# EAGLE board Qwiic Pi SHIM_double_slot-Panel (EAGLE 9.5.1), part 1 of 2
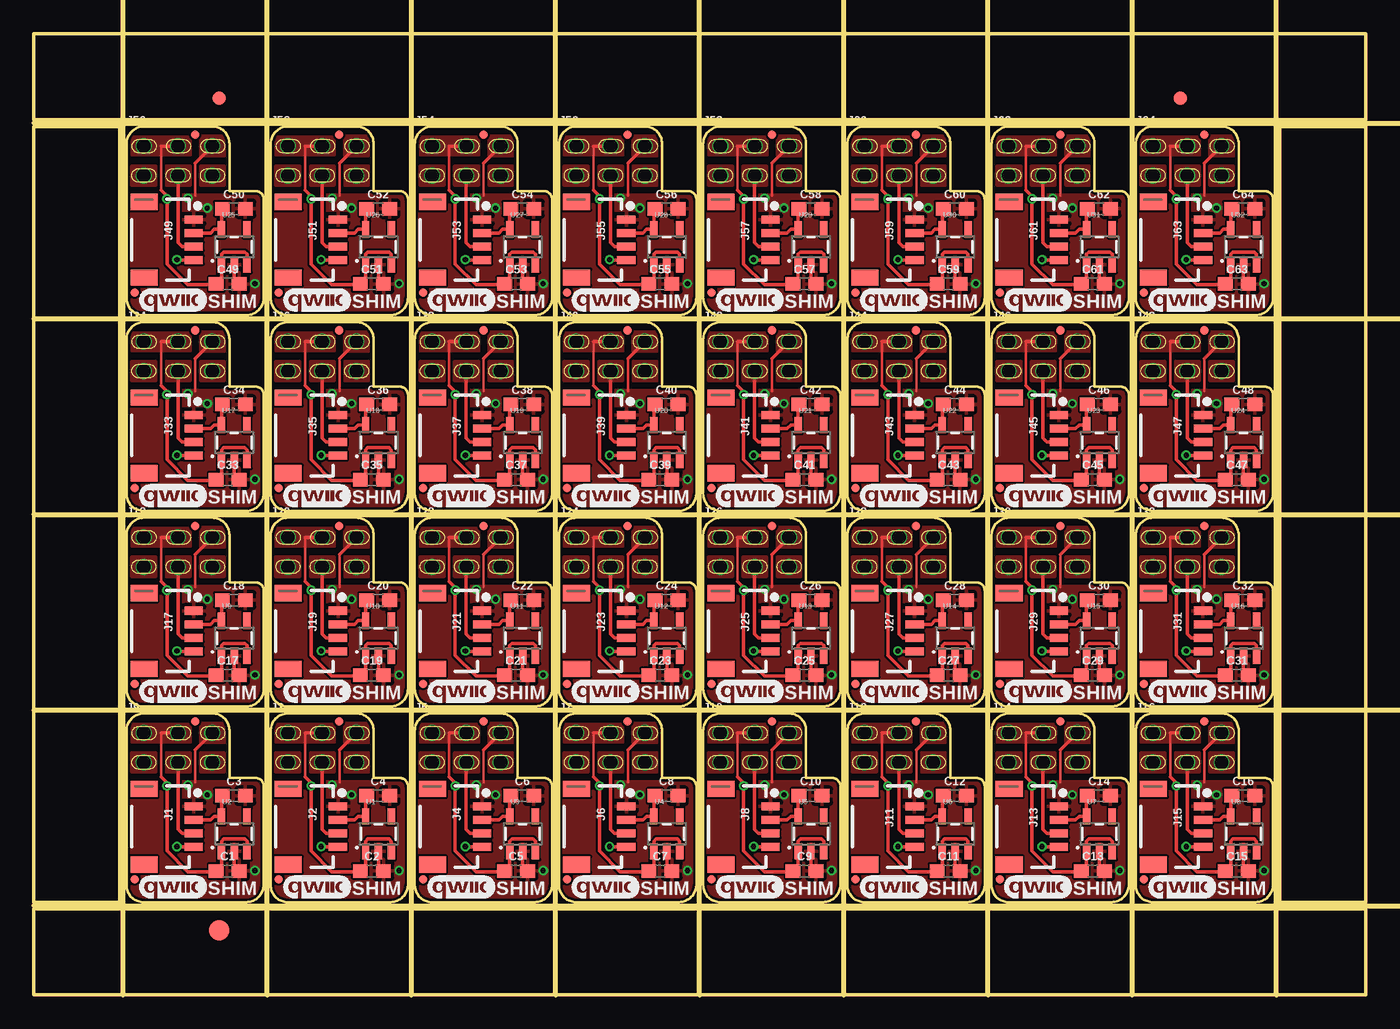
[diagram p0: board, top side]
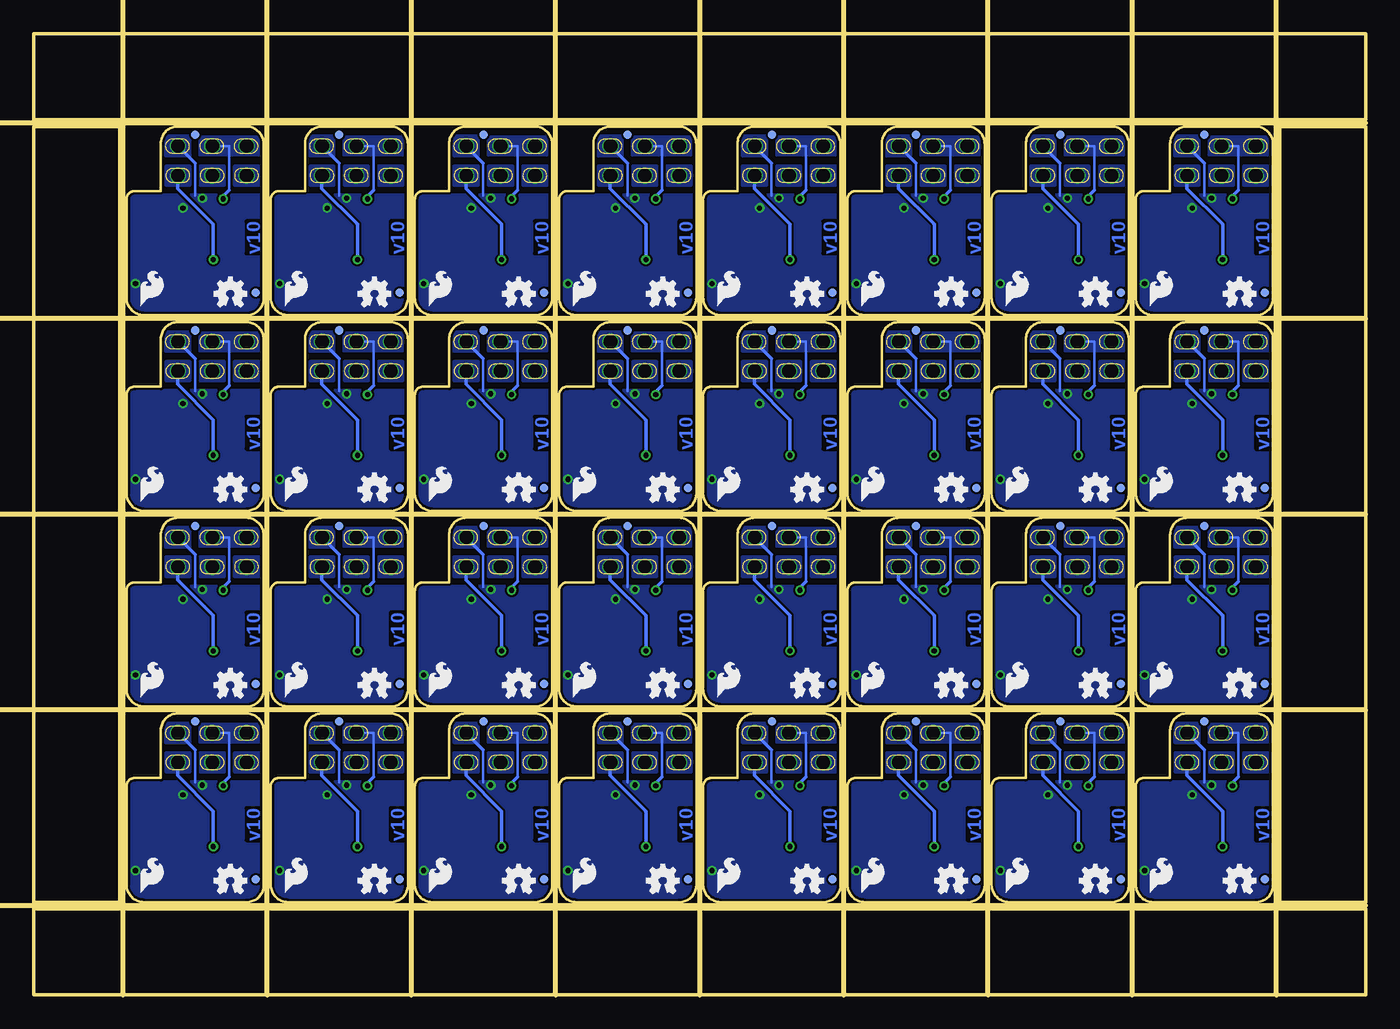
[diagram p1: board, bottom side, seen from below]

Size 98.55 x 71.12 mm. Coordinates in mm from the lower left corner, seen from the top.
Outline: 368 segments
Copper layers (1*16): Top 0.035mm / dielectric 1.5mm / Bottom 0.035mm
Design rules "SparkFun-2-layer-PCBWay-LIMIT *": minimum track width 6mil, minimum drill 0.3mm, track to track 6mil, track to pad 6mil, pad to pad 6mil, via to via 6mil, smd to smd 6mil, copper to edge 6mil, drill to drill 6mil, minimum pad ring 2mil, minimum via ring 6mil, stop-mask expansion 4mil, vias tented up to drill 25mil, thermal gap 10mil
Net classes: 0 Default: width 0.178 mm; 1 vcc: width 0.178 mm
Milling: 14 lines

## Footprints (pad centres in the part's own frame; a part is rotated, then mirrored left to right if it is on the bottom)
0603 = smd 1.1 x 1: 1 -0.85,0; 2 0.85,0
FIDUCIAL-1X2 = smd 1 x 1: 1 0,0
FIDUCIAL-1.5X3 = smd 1.5 x 1.5: 1 0,0
FIDUCIAL-MICRO = smd 0.635 x 0.635: 1 0,0
1X04_1MM_RA = smd 0.6 x 1.35: 1 -1.5,0; 2 -0.5,0; 3 0.5,0; 4 1.5,0 | smd 1.2 x 2: NC1 2.8,-3.675; NC2 -2.8,-3.675
SPARKFUN-CONNECTORS_2X3-NS_PISHIM_LOCKING_SLOTS_DOUBLE = drill 1.016 pad 1.168: 1 -2.54,-1.092; 2 -2.54,1.092; 3 0,-1.092; 4 0,1.092; 5 2.54,-1.092; 6 2.54,1.092
SOT23-5 = smd 0.55 x 1.2: 1 -0.95,-1.3; 2 0,-1.3; 3 0.95,-1.3; 4 0.95,1.3; 5 -0.95,1.3

## Placement (x,y rotation side)
C1  1.0uF  [0603]  14.35,9.17 0 top
C2  1.0uF  [0603]  25.02,9.17 0 top
C3  1.0uF  [0603]  14.81,14.73 0 top
C4  1.0uF  [0603]  25.48,14.73 0 top
C5  1.0uF  [0603]  35.69,9.17 0 top
C6  1.0uF  [0603]  36.14,14.73 0 top
C7  1.0uF  [0603]  46.35,9.17 0 top
C8  1.0uF  [0603]  46.81,14.73 0 top
C9  1.0uF  [0603]  57.02,9.17 0 top
C10  1.0uF  [0603]  57.48,14.73 0 top
C11  1.0uF  [0603]  67.69,9.17 0 top
C12  1.0uF  [0603]  68.15,14.73 0 top
C13  1.0uF  [0603]  78.36,9.17 0 top
C14  1.0uF  [0603]  78.82,14.73 0 top
C15  1.0uF  [0603]  89.03,9.17 0 top
C16  1.0uF  [0603]  89.48,14.73 0 top
C17  1.0uF  [0603]  14.35,23.65 0 top
C18  1.0uF  [0603]  14.81,29.21 0 top
C19  1.0uF  [0603]  25.02,23.65 0 top
C20  1.0uF  [0603]  25.48,29.21 0 top
C21  1.0uF  [0603]  35.69,23.65 0 top
C22  1.0uF  [0603]  36.14,29.21 0 top
C23  1.0uF  [0603]  46.35,23.65 0 top
C24  1.0uF  [0603]  46.81,29.21 0 top
C25  1.0uF  [0603]  57.02,23.65 0 top
C26  1.0uF  [0603]  57.48,29.21 0 top
C27  1.0uF  [0603]  67.69,23.65 0 top
C28  1.0uF  [0603]  68.15,29.21 0 top
C29  1.0uF  [0603]  78.36,23.65 0 top
C30  1.0uF  [0603]  78.82,29.21 0 top
C31  1.0uF  [0603]  89.03,23.65 0 top
C32  1.0uF  [0603]  89.48,29.21 0 top
C33  1.0uF  [0603]  14.35,38.13 0 top
C34  1.0uF  [0603]  14.81,43.69 0 top
C35  1.0uF  [0603]  25.02,38.13 0 top
C36  1.0uF  [0603]  25.48,43.69 0 top
C37  1.0uF  [0603]  35.69,38.13 0 top
C38  1.0uF  [0603]  36.14,43.69 0 top
C39  1.0uF  [0603]  46.35,38.13 0 top
C40  1.0uF  [0603]  46.81,43.69 0 top
C41  1.0uF  [0603]  57.02,38.13 0 top
C42  1.0uF  [0603]  57.48,43.69 0 top
C43  1.0uF  [0603]  67.69,38.13 0 top
C44  1.0uF  [0603]  68.15,43.69 0 top
C45  1.0uF  [0603]  78.36,38.13 0 top
C46  1.0uF  [0603]  78.82,43.69 0 top
C47  1.0uF  [0603]  89.03,38.13 0 top
C48  1.0uF  [0603]  89.48,43.69 0 top
C49  1.0uF  [0603]  14.35,52.6 0 top
C50  1.0uF  [0603]  14.81,58.17 0 top
C51  1.0uF  [0603]  25.02,52.6 0 top
C52  1.0uF  [0603]  25.48,58.17 0 top
C53  1.0uF  [0603]  35.69,52.6 0 top
C54  1.0uF  [0603]  36.14,58.17 0 top
C55  1.0uF  [0603]  46.35,52.6 0 top
C56  1.0uF  [0603]  46.81,58.17 0 top
C57  1.0uF  [0603]  57.02,52.6 0 top
C58  1.0uF  [0603]  57.48,58.17 0 top
C59  1.0uF  [0603]  67.69,52.6 0 top
C60  1.0uF  [0603]  68.15,58.17 0 top
C61  1.0uF  [0603]  78.36,52.6 0 top
C62  1.0uF  [0603]  78.82,58.17 0 top
C63  1.0uF  [0603]  89.03,52.6 0 top
C64  1.0uF  [0603]  89.48,58.17 0 top
E$1  [FIDUCIAL-1X2]  13.72,66.36 0 top
E$2  [FIDUCIAL-1X2]  84.84,66.36 0 top
E$3  [FIDUCIAL-1.5X3]  13.72,4.76 0 top
FD1  FIDUCIALUFIDUCIAL  [FIDUCIAL-MICRO]  11.94,20.22 180 top
FD2  FIDUCIALUFIDUCIAL  [FIDUCIAL-MICRO]  7.47,8.55 180 top
FD3  FIDUCIALUFIDUCIAL  [FIDUCIAL-MICRO]  7.47,8.55 0 bottom
FD4  FIDUCIALUFIDUCIAL  [FIDUCIAL-MICRO]  11.94,20.22 0 bottom
FD5  FIDUCIALUFIDUCIAL  [FIDUCIAL-MICRO]  22.61,20.22 180 top
FD6  FIDUCIALUFIDUCIAL  [FIDUCIAL-MICRO]  18.14,8.55 180 top
FD7  FIDUCIALUFIDUCIAL  [FIDUCIAL-MICRO]  18.14,8.55 0 bottom
FD8  FIDUCIALUFIDUCIAL  [FIDUCIAL-MICRO]  22.61,20.22 0 bottom
FD9  FIDUCIALUFIDUCIAL  [FIDUCIAL-MICRO]  33.27,20.22 180 top
FD10  FIDUCIALUFIDUCIAL  [FIDUCIAL-MICRO]  28.8,8.55 180 top
FD11  FIDUCIALUFIDUCIAL  [FIDUCIAL-MICRO]  28.8,8.55 0 bottom
FD12  FIDUCIALUFIDUCIAL  [FIDUCIAL-MICRO]  33.27,20.22 0 bottom
FD13  FIDUCIALUFIDUCIAL  [FIDUCIAL-MICRO]  43.94,20.22 180 top
FD14  FIDUCIALUFIDUCIAL  [FIDUCIAL-MICRO]  39.47,8.55 180 top
FD15  FIDUCIALUFIDUCIAL  [FIDUCIAL-MICRO]  39.47,8.55 0 bottom
FD16  FIDUCIALUFIDUCIAL  [FIDUCIAL-MICRO]  43.94,20.22 0 bottom
FD17  FIDUCIALUFIDUCIAL  [FIDUCIAL-MICRO]  54.61,20.22 180 top
FD18  FIDUCIALUFIDUCIAL  [FIDUCIAL-MICRO]  50.14,8.55 180 top
FD19  FIDUCIALUFIDUCIAL  [FIDUCIAL-MICRO]  50.14,8.55 0 bottom
FD20  FIDUCIALUFIDUCIAL  [FIDUCIAL-MICRO]  54.61,20.22 0 bottom
FD21  FIDUCIALUFIDUCIAL  [FIDUCIAL-MICRO]  65.28,20.22 180 top
FD22  FIDUCIALUFIDUCIAL  [FIDUCIAL-MICRO]  60.81,8.55 180 top
FD23  FIDUCIALUFIDUCIAL  [FIDUCIAL-MICRO]  60.81,8.55 0 bottom
FD24  FIDUCIALUFIDUCIAL  [FIDUCIAL-MICRO]  65.28,20.22 0 bottom
FD25  FIDUCIALUFIDUCIAL  [FIDUCIAL-MICRO]  75.95,20.22 180 top
FD26  FIDUCIALUFIDUCIAL  [FIDUCIAL-MICRO]  71.48,8.55 180 top
FD27  FIDUCIALUFIDUCIAL  [FIDUCIAL-MICRO]  71.48,8.55 0 bottom
FD28  FIDUCIALUFIDUCIAL  [FIDUCIAL-MICRO]  75.95,20.22 0 bottom
FD29  FIDUCIALUFIDUCIAL  [FIDUCIAL-MICRO]  86.61,20.22 180 top
FD30  FIDUCIALUFIDUCIAL  [FIDUCIAL-MICRO]  82.14,8.55 180 top
FD31  FIDUCIALUFIDUCIAL  [FIDUCIAL-MICRO]  82.14,8.55 0 bottom
FD32  FIDUCIALUFIDUCIAL  [FIDUCIAL-MICRO]  86.61,20.22 0 bottom
FD33  FIDUCIALUFIDUCIAL  [FIDUCIAL-MICRO]  11.94,34.7 180 top
FD34  FIDUCIALUFIDUCIAL  [FIDUCIAL-MICRO]  7.47,23.03 180 top
FD35  FIDUCIALUFIDUCIAL  [FIDUCIAL-MICRO]  7.47,23.03 0 bottom
FD36  FIDUCIALUFIDUCIAL  [FIDUCIAL-MICRO]  11.94,34.7 0 bottom
FD37  FIDUCIALUFIDUCIAL  [FIDUCIAL-MICRO]  22.61,34.7 180 top
FD38  FIDUCIALUFIDUCIAL  [FIDUCIAL-MICRO]  18.14,23.03 180 top
FD39  FIDUCIALUFIDUCIAL  [FIDUCIAL-MICRO]  18.14,23.03 0 bottom
FD40  FIDUCIALUFIDUCIAL  [FIDUCIAL-MICRO]  22.61,34.7 0 bottom
FD41  FIDUCIALUFIDUCIAL  [FIDUCIAL-MICRO]  33.27,34.7 180 top
FD42  FIDUCIALUFIDUCIAL  [FIDUCIAL-MICRO]  28.8,23.03 180 top
FD43  FIDUCIALUFIDUCIAL  [FIDUCIAL-MICRO]  28.8,23.03 0 bottom
FD44  FIDUCIALUFIDUCIAL  [FIDUCIAL-MICRO]  33.27,34.7 0 bottom
FD45  FIDUCIALUFIDUCIAL  [FIDUCIAL-MICRO]  43.94,34.7 180 top
FD46  FIDUCIALUFIDUCIAL  [FIDUCIAL-MICRO]  39.47,23.03 180 top
FD47  FIDUCIALUFIDUCIAL  [FIDUCIAL-MICRO]  39.47,23.03 0 bottom
FD48  FIDUCIALUFIDUCIAL  [FIDUCIAL-MICRO]  43.94,34.7 0 bottom
FD49  FIDUCIALUFIDUCIAL  [FIDUCIAL-MICRO]  54.61,34.7 180 top
FD50  FIDUCIALUFIDUCIAL  [FIDUCIAL-MICRO]  50.14,23.03 180 top
FD51  FIDUCIALUFIDUCIAL  [FIDUCIAL-MICRO]  50.14,23.03 0 bottom
FD52  FIDUCIALUFIDUCIAL  [FIDUCIAL-MICRO]  54.61,34.7 0 bottom
FD53  FIDUCIALUFIDUCIAL  [FIDUCIAL-MICRO]  65.28,34.7 180 top
FD54  FIDUCIALUFIDUCIAL  [FIDUCIAL-MICRO]  60.81,23.03 180 top
FD55  FIDUCIALUFIDUCIAL  [FIDUCIAL-MICRO]  60.81,23.03 0 bottom
FD56  FIDUCIALUFIDUCIAL  [FIDUCIAL-MICRO]  65.28,34.7 0 bottom
FD57  FIDUCIALUFIDUCIAL  [FIDUCIAL-MICRO]  75.95,34.7 180 top
FD58  FIDUCIALUFIDUCIAL  [FIDUCIAL-MICRO]  71.48,23.03 180 top
FD59  FIDUCIALUFIDUCIAL  [FIDUCIAL-MICRO]  71.48,23.03 0 bottom
FD60  FIDUCIALUFIDUCIAL  [FIDUCIAL-MICRO]  75.95,34.7 0 bottom
FD61  FIDUCIALUFIDUCIAL  [FIDUCIAL-MICRO]  86.61,34.7 180 top
FD62  FIDUCIALUFIDUCIAL  [FIDUCIAL-MICRO]  82.14,23.03 180 top
FD63  FIDUCIALUFIDUCIAL  [FIDUCIAL-MICRO]  82.14,23.03 0 bottom
FD64  FIDUCIALUFIDUCIAL  [FIDUCIAL-MICRO]  86.61,34.7 0 bottom
FD65  FIDUCIALUFIDUCIAL  [FIDUCIAL-MICRO]  11.94,49.17 180 top
FD66  FIDUCIALUFIDUCIAL  [FIDUCIAL-MICRO]  7.47,37.5 180 top
FD67  FIDUCIALUFIDUCIAL  [FIDUCIAL-MICRO]  7.47,37.5 0 bottom
FD68  FIDUCIALUFIDUCIAL  [FIDUCIAL-MICRO]  11.94,49.17 0 bottom
FD69  FIDUCIALUFIDUCIAL  [FIDUCIAL-MICRO]  22.61,49.17 180 top
FD70  FIDUCIALUFIDUCIAL  [FIDUCIAL-MICRO]  18.14,37.5 180 top
FD71  FIDUCIALUFIDUCIAL  [FIDUCIAL-MICRO]  18.14,37.5 0 bottom
FD72  FIDUCIALUFIDUCIAL  [FIDUCIAL-MICRO]  22.61,49.17 0 bottom
FD73  FIDUCIALUFIDUCIAL  [FIDUCIAL-MICRO]  33.27,49.17 180 top
FD74  FIDUCIALUFIDUCIAL  [FIDUCIAL-MICRO]  28.8,37.5 180 top
FD75  FIDUCIALUFIDUCIAL  [FIDUCIAL-MICRO]  28.8,37.5 0 bottom
FD76  FIDUCIALUFIDUCIAL  [FIDUCIAL-MICRO]  33.27,49.17 0 bottom
FD77  FIDUCIALUFIDUCIAL  [FIDUCIAL-MICRO]  43.94,49.17 180 top
FD78  FIDUCIALUFIDUCIAL  [FIDUCIAL-MICRO]  39.47,37.5 180 top
FD79  FIDUCIALUFIDUCIAL  [FIDUCIAL-MICRO]  39.47,37.5 0 bottom
FD80  FIDUCIALUFIDUCIAL  [FIDUCIAL-MICRO]  43.94,49.17 0 bottom
FD81  FIDUCIALUFIDUCIAL  [FIDUCIAL-MICRO]  54.61,49.17 180 top
FD82  FIDUCIALUFIDUCIAL  [FIDUCIAL-MICRO]  50.14,37.5 180 top
FD83  FIDUCIALUFIDUCIAL  [FIDUCIAL-MICRO]  50.14,37.5 0 bottom
FD84  FIDUCIALUFIDUCIAL  [FIDUCIAL-MICRO]  54.61,49.17 0 bottom
FD85  FIDUCIALUFIDUCIAL  [FIDUCIAL-MICRO]  65.28,49.17 180 top
FD86  FIDUCIALUFIDUCIAL  [FIDUCIAL-MICRO]  60.81,37.5 180 top
FD87  FIDUCIALUFIDUCIAL  [FIDUCIAL-MICRO]  60.81,37.5 0 bottom
FD88  FIDUCIALUFIDUCIAL  [FIDUCIAL-MICRO]  65.28,49.17 0 bottom
FD89  FIDUCIALUFIDUCIAL  [FIDUCIAL-MICRO]  75.95,49.17 180 top
FD90  FIDUCIALUFIDUCIAL  [FIDUCIAL-MICRO]  71.48,37.5 180 top
FD91  FIDUCIALUFIDUCIAL  [FIDUCIAL-MICRO]  71.48,37.5 0 bottom
FD92  FIDUCIALUFIDUCIAL  [FIDUCIAL-MICRO]  75.95,49.17 0 bottom
FD93  FIDUCIALUFIDUCIAL  [FIDUCIAL-MICRO]  86.61,49.17 180 top
FD94  FIDUCIALUFIDUCIAL  [FIDUCIAL-MICRO]  82.14,37.5 180 top
FD95  FIDUCIALUFIDUCIAL  [FIDUCIAL-MICRO]  82.14,37.5 0 bottom
FD96  FIDUCIALUFIDUCIAL  [FIDUCIAL-MICRO]  86.61,49.17 0 bottom
FD97  FIDUCIALUFIDUCIAL  [FIDUCIAL-MICRO]  11.94,63.65 180 top
FD98  FIDUCIALUFIDUCIAL  [FIDUCIAL-MICRO]  7.47,51.98 180 top
FD99  FIDUCIALUFIDUCIAL  [FIDUCIAL-MICRO]  7.47,51.98 0 bottom
FD100  FIDUCIALUFIDUCIAL  [FIDUCIAL-MICRO]  11.94,63.65 0 bottom
FD101  FIDUCIALUFIDUCIAL  [FIDUCIAL-MICRO]  22.61,63.65 180 top
FD102  FIDUCIALUFIDUCIAL  [FIDUCIAL-MICRO]  18.14,51.98 180 top
FD103  FIDUCIALUFIDUCIAL  [FIDUCIAL-MICRO]  18.14,51.98 0 bottom
FD104  FIDUCIALUFIDUCIAL  [FIDUCIAL-MICRO]  22.61,63.65 0 bottom
FD105  FIDUCIALUFIDUCIAL  [FIDUCIAL-MICRO]  33.27,63.65 180 top
FD106  FIDUCIALUFIDUCIAL  [FIDUCIAL-MICRO]  28.8,51.98 180 top
FD107  FIDUCIALUFIDUCIAL  [FIDUCIAL-MICRO]  28.8,51.98 0 bottom
FD108  FIDUCIALUFIDUCIAL  [FIDUCIAL-MICRO]  33.27,63.65 0 bottom
FD109  FIDUCIALUFIDUCIAL  [FIDUCIAL-MICRO]  43.94,63.65 180 top
FD110  FIDUCIALUFIDUCIAL  [FIDUCIAL-MICRO]  39.47,51.98 180 top
FD111  FIDUCIALUFIDUCIAL  [FIDUCIAL-MICRO]  39.47,51.98 0 bottom
FD112  FIDUCIALUFIDUCIAL  [FIDUCIAL-MICRO]  43.94,63.65 0 bottom
FD113  FIDUCIALUFIDUCIAL  [FIDUCIAL-MICRO]  54.61,63.65 180 top
FD114  FIDUCIALUFIDUCIAL  [FIDUCIAL-MICRO]  50.14,51.98 180 top
FD115  FIDUCIALUFIDUCIAL  [FIDUCIAL-MICRO]  50.14,51.98 0 bottom
FD116  FIDUCIALUFIDUCIAL  [FIDUCIAL-MICRO]  54.61,63.65 0 bottom
FD117  FIDUCIALUFIDUCIAL  [FIDUCIAL-MICRO]  65.28,63.65 180 top
FD118  FIDUCIALUFIDUCIAL  [FIDUCIAL-MICRO]  60.81,51.98 180 top
FD119  FIDUCIALUFIDUCIAL  [FIDUCIAL-MICRO]  60.81,51.98 0 bottom
FD120  FIDUCIALUFIDUCIAL  [FIDUCIAL-MICRO]  65.28,63.65 0 bottom
FD121  FIDUCIALUFIDUCIAL  [FIDUCIAL-MICRO]  75.95,63.65 180 top
FD122  FIDUCIALUFIDUCIAL  [FIDUCIAL-MICRO]  71.48,51.98 180 top
FD123  FIDUCIALUFIDUCIAL  [FIDUCIAL-MICRO]  71.48,51.98 0 bottom
FD124  FIDUCIALUFIDUCIAL  [FIDUCIAL-MICRO]  75.95,63.65 0 bottom
FD125  FIDUCIALUFIDUCIAL  [FIDUCIAL-MICRO]  86.61,63.65 180 top
FD126  FIDUCIALUFIDUCIAL  [FIDUCIAL-MICRO]  82.14,51.98 180 top
FD127  FIDUCIALUFIDUCIAL  [FIDUCIAL-MICRO]  82.14,51.98 0 bottom
FD128  FIDUCIALUFIDUCIAL  [FIDUCIAL-MICRO]  86.61,63.65 0 bottom
J1  Qwiic Right Angle  [1X04_1MM_RA]  11.84,12.45 270 top
J2  Qwiic Right Angle  [1X04_1MM_RA]  22.5,12.45 270 top
J3  [SPARKFUN-CONNECTORS_2X3-NS_PISHIM_LOCKING_SLOTS_DOUBLE]  21.34,18.29 0 top
J4  Qwiic Right Angle  [1X04_1MM_RA]  33.17,12.45 270 top
J5  [SPARKFUN-CONNECTORS_2X3-NS_PISHIM_LOCKING_SLOTS_DOUBLE]  32,18.29 0 top
J6  Qwiic Right Angle  [1X04_1MM_RA]  43.84,12.45 270 top
J7  [SPARKFUN-CONNECTORS_2X3-NS_PISHIM_LOCKING_SLOTS_DOUBLE]  42.67,18.29 0 top
J8  Qwiic Right Angle  [1X04_1MM_RA]  54.51,12.45 270 top
J9  [SPARKFUN-CONNECTORS_2X3-NS_PISHIM_LOCKING_SLOTS_DOUBLE]  10.67,18.29 0 top
J10  [SPARKFUN-CONNECTORS_2X3-NS_PISHIM_LOCKING_SLOTS_DOUBLE]  53.34,18.29 0 top
J11  Qwiic Right Angle  [1X04_1MM_RA]  65.18,12.45 270 top
J12  [SPARKFUN-CONNECTORS_2X3-NS_PISHIM_LOCKING_SLOTS_DOUBLE]  64.01,18.29 0 top
J13  Qwiic Right Angle  [1X04_1MM_RA]  75.84,12.45 270 top
J14  [SPARKFUN-CONNECTORS_2X3-NS_PISHIM_LOCKING_SLOTS_DOUBLE]  74.68,18.29 0 top
J15  Qwiic Right Angle  [1X04_1MM_RA]  86.51,12.45 270 top
J16  [SPARKFUN-CONNECTORS_2X3-NS_PISHIM_LOCKING_SLOTS_DOUBLE]  85.34,18.29 0 top
J17  Qwiic Right Angle  [1X04_1MM_RA]  11.84,26.92 270 top
J18  [SPARKFUN-CONNECTORS_2X3-NS_PISHIM_LOCKING_SLOTS_DOUBLE]  10.67,32.77 0 top
J19  Qwiic Right Angle  [1X04_1MM_RA]  22.5,26.92 270 top
J20  [SPARKFUN-CONNECTORS_2X3-NS_PISHIM_LOCKING_SLOTS_DOUBLE]  21.34,32.77 0 top
J21  Qwiic Right Angle  [1X04_1MM_RA]  33.17,26.92 270 top
J22  [SPARKFUN-CONNECTORS_2X3-NS_PISHIM_LOCKING_SLOTS_DOUBLE]  32,32.77 0 top
J23  Qwiic Right Angle  [1X04_1MM_RA]  43.84,26.92 270 top
J24  [SPARKFUN-CONNECTORS_2X3-NS_PISHIM_LOCKING_SLOTS_DOUBLE]  42.67,32.77 0 top
J25  Qwiic Right Angle  [1X04_1MM_RA]  54.51,26.92 270 top
J26  [SPARKFUN-CONNECTORS_2X3-NS_PISHIM_LOCKING_SLOTS_DOUBLE]  53.34,32.77 0 top
J27  Qwiic Right Angle  [1X04_1MM_RA]  65.18,26.92 270 top
J28  [SPARKFUN-CONNECTORS_2X3-NS_PISHIM_LOCKING_SLOTS_DOUBLE]  64.01,32.77 0 top
J29  Qwiic Right Angle  [1X04_1MM_RA]  75.84,26.92 270 top
J30  [SPARKFUN-CONNECTORS_2X3-NS_PISHIM_LOCKING_SLOTS_DOUBLE]  74.68,32.77 0 top
J31  Qwiic Right Angle  [1X04_1MM_RA]  86.51,26.92 270 top
J32  [SPARKFUN-CONNECTORS_2X3-NS_PISHIM_LOCKING_SLOTS_DOUBLE]  85.34,32.77 0 top
J33  Qwiic Right Angle  [1X04_1MM_RA]  11.84,41.4 270 top
J34  [SPARKFUN-CONNECTORS_2X3-NS_PISHIM_LOCKING_SLOTS_DOUBLE]  10.67,47.24 0 top
J35  Qwiic Right Angle  [1X04_1MM_RA]  22.5,41.4 270 top
J36  [SPARKFUN-CONNECTORS_2X3-NS_PISHIM_LOCKING_SLOTS_DOUBLE]  21.34,47.24 0 top
J37  Qwiic Right Angle  [1X04_1MM_RA]  33.17,41.4 270 top
J38  [SPARKFUN-CONNECTORS_2X3-NS_PISHIM_LOCKING_SLOTS_DOUBLE]  32,47.24 0 top
J39  Qwiic Right Angle  [1X04_1MM_RA]  43.84,41.4 270 top
J40  [SPARKFUN-CONNECTORS_2X3-NS_PISHIM_LOCKING_SLOTS_DOUBLE]  42.67,47.24 0 top
J41  Qwiic Right Angle  [1X04_1MM_RA]  54.51,41.4 270 top
J42  [SPARKFUN-CONNECTORS_2X3-NS_PISHIM_LOCKING_SLOTS_DOUBLE]  53.34,47.24 0 top
J43  Qwiic Right Angle  [1X04_1MM_RA]  65.18,41.4 270 top
J44  [SPARKFUN-CONNECTORS_2X3-NS_PISHIM_LOCKING_SLOTS_DOUBLE]  64.01,47.24 0 top
J45  Qwiic Right Angle  [1X04_1MM_RA]  75.84,41.4 270 top
J46  [SPARKFUN-CONNECTORS_2X3-NS_PISHIM_LOCKING_SLOTS_DOUBLE]  74.68,47.24 0 top
J47  Qwiic Right Angle  [1X04_1MM_RA]  86.51,41.4 270 top
J48  [SPARKFUN-CONNECTORS_2X3-NS_PISHIM_LOCKING_SLOTS_DOUBLE]  85.34,47.24 0 top
J49  Qwiic Right Angle  [1X04_1MM_RA]  11.84,55.88 270 top
J50  [SPARKFUN-CONNECTORS_2X3-NS_PISHIM_LOCKING_SLOTS_DOUBLE]  10.67,61.72 0 top
J51  Qwiic Right Angle  [1X04_1MM_RA]  22.5,55.88 270 top
J52  [SPARKFUN-CONNECTORS_2X3-NS_PISHIM_LOCKING_SLOTS_DOUBLE]  21.34,61.72 0 top
J53  Qwiic Right Angle  [1X04_1MM_RA]  33.17,55.88 270 top
J54  [SPARKFUN-CONNECTORS_2X3-NS_PISHIM_LOCKING_SLOTS_DOUBLE]  32,61.72 0 top
J55  Qwiic Right Angle  [1X04_1MM_RA]  43.84,55.88 270 top
J56  [SPARKFUN-CONNECTORS_2X3-NS_PISHIM_LOCKING_SLOTS_DOUBLE]  42.67,61.72 0 top
J57  Qwiic Right Angle  [1X04_1MM_RA]  54.51,55.88 270 top
J58  [SPARKFUN-CONNECTORS_2X3-NS_PISHIM_LOCKING_SLOTS_DOUBLE]  53.34,61.72 0 top
J59  Qwiic Right Angle  [1X04_1MM_RA]  65.18,55.88 270 top
J60  [SPARKFUN-CONNECTORS_2X3-NS_PISHIM_LOCKING_SLOTS_DOUBLE]  64.01,61.72 0 top
J61  Qwiic Right Angle  [1X04_1MM_RA]  75.84,55.88 270 top
J62  [SPARKFUN-CONNECTORS_2X3-NS_PISHIM_LOCKING_SLOTS_DOUBLE]  74.68,61.72 0 top
J63  Qwiic Right Angle  [1X04_1MM_RA]  86.51,55.88 270 top
J64  [SPARKFUN-CONNECTORS_2X3-NS_PISHIM_LOCKING_SLOTS_DOUBLE]  85.34,61.72 0 top
LOGO1  OSHW-LOGOMINI  [OSHW-LOGO-MINI]  9.33,8.46 0 bottom
LOGO2  OSHW-LOGOMINI  [OSHW-LOGO-MINI]  20,8.46 0 bottom
LOGO3  OSHW-LOGOMINI  [OSHW-LOGO-MINI]  30.67,8.46 0 bottom
LOGO4  OSHW-LOGOMINI  [OSHW-LOGO-MINI]  41.34,8.46 0 bottom
LOGO5  OSHW-LOGOMINI  [OSHW-LOGO-MINI]  52.01,8.46 0 bottom
LOGO6  OSHW-LOGOMINI  [OSHW-LOGO-MINI]  62.67,8.46 0 bottom
LOGO7  OSHW-LOGOMINI  [OSHW-LOGO-MINI]  73.34,8.46 0 bottom
LOGO8  OSHW-LOGOMINI  [OSHW-LOGO-MINI]  84.01,8.46 0 bottom
LOGO9  OSHW-LOGOMINI  [OSHW-LOGO-MINI]  9.33,22.94 0 bottom
LOGO10  OSHW-LOGOMINI  [OSHW-LOGO-MINI]  20,22.94 0 bottom
LOGO11  OSHW-LOGOMINI  [OSHW-LOGO-MINI]  30.67,22.94 0 bottom
LOGO12  OSHW-LOGOMINI  [OSHW-LOGO-MINI]  41.34,22.94 0 bottom
LOGO13  OSHW-LOGOMINI  [OSHW-LOGO-MINI]  52.01,22.94 0 bottom
LOGO14  OSHW-LOGOMINI  [OSHW-LOGO-MINI]  62.67,22.94 0 bottom
LOGO15  OSHW-LOGOMINI  [OSHW-LOGO-MINI]  73.34,22.94 0 bottom
LOGO16  OSHW-LOGOMINI  [OSHW-LOGO-MINI]  84.01,22.94 0 bottom
LOGO17  OSHW-LOGOMINI  [OSHW-LOGO-MINI]  9.33,37.41 0 bottom
LOGO18  OSHW-LOGOMINI  [OSHW-LOGO-MINI]  20,37.41 0 bottom
LOGO19  OSHW-LOGOMINI  [OSHW-LOGO-MINI]  30.67,37.41 0 bottom
LOGO20  OSHW-LOGOMINI  [OSHW-LOGO-MINI]  41.34,37.41 0 bottom
LOGO21  OSHW-LOGOMINI  [OSHW-LOGO-MINI]  52.01,37.41 0 bottom
LOGO22  OSHW-LOGOMINI  [OSHW-LOGO-MINI]  62.67,37.41 0 bottom
LOGO23  OSHW-LOGOMINI  [OSHW-LOGO-MINI]  73.34,37.41 0 bottom
LOGO24  OSHW-LOGOMINI  [OSHW-LOGO-MINI]  84.01,37.41 0 bottom
LOGO25  OSHW-LOGOMINI  [OSHW-LOGO-MINI]  9.33,51.89 0 bottom
LOGO26  OSHW-LOGOMINI  [OSHW-LOGO-MINI]  20,51.89 0 bottom
LOGO27  OSHW-LOGOMINI  [OSHW-LOGO-MINI]  30.67,51.89 0 bottom
LOGO28  OSHW-LOGOMINI  [OSHW-LOGO-MINI]  41.34,51.89 0 bottom
LOGO29  OSHW-LOGOMINI  [OSHW-LOGO-MINI]  52.01,51.89 0 bottom
LOGO30  OSHW-LOGOMINI  [OSHW-LOGO-MINI]  62.67,51.89 0 bottom
LOGO31  OSHW-LOGOMINI  [OSHW-LOGO-MINI]  73.34,51.89 0 bottom
LOGO32  OSHW-LOGOMINI  [OSHW-LOGO-MINI]  84.01,51.89 0 bottom
U1  3.3V/600mA  [SOT23-5]  25.5,11.91 0 top
U2  3.3V/600mA  [SOT23-5]  14.83,11.91 0 top
U3  3.3V/600mA  [SOT23-5]  36.17,11.91 0 top
U4  3.3V/600mA  [SOT23-5]  46.84,11.91 0 top
U5  3.3V/600mA  [SOT23-5]  57.51,11.91 0 top
U6  3.3V/600mA  [SOT23-5]  68.17,11.91 0 top
U7  3.3V/600mA  [SOT23-5]  78.84,11.91 0 top
U8  3.3V/600mA  [SOT23-5]  89.51,11.91 0 top
U9  3.3V/600mA  [SOT23-5]  14.83,26.39 0 top
U10  3.3V/600mA  [SOT23-5]  25.5,26.39 0 top
U11  3.3V/600mA  [SOT23-5]  36.17,26.39 0 top
U12  3.3V/600mA  [SOT23-5]  46.84,26.39 0 top
U13  3.3V/600mA  [SOT23-5]  57.51,26.39 0 top
U14  3.3V/600mA  [SOT23-5]  68.17,26.39 0 top
U15  3.3V/600mA  [SOT23-5]  78.84,26.39 0 top
U16  3.3V/600mA  [SOT23-5]  89.51,26.39 0 top
U17  3.3V/600mA  [SOT23-5]  14.83,40.87 0 top
U18  3.3V/600mA  [SOT23-5]  25.5,40.87 0 top
U19  3.3V/600mA  [SOT23-5]  36.17,40.87 0 top
U20  3.3V/600mA  [SOT23-5]  46.84,40.87 0 top
U21  3.3V/600mA  [SOT23-5]  57.51,40.87 0 top
U22  3.3V/600mA  [SOT23-5]  68.17,40.87 0 top
U23  3.3V/600mA  [SOT23-5]  78.84,40.87 0 top
U24  3.3V/600mA  [SOT23-5]  89.51,40.87 0 top
U25  3.3V/600mA  [SOT23-5]  14.83,55.35 0 top
U26  3.3V/600mA  [SOT23-5]  25.5,55.35 0 top
U27  3.3V/600mA  [SOT23-5]  36.17,55.35 0 top
U28  3.3V/600mA  [SOT23-5]  46.84,55.35 0 top
U29  3.3V/600mA  [SOT23-5]  57.51,55.35 0 top
U30  3.3V/600mA  [SOT23-5]  68.17,55.35 0 top
U31  3.3V/600mA  [SOT23-5]  78.84,55.35 0 top
U32  3.3V/600mA  [SOT23-5]  89.51,55.35 0 top
U$1  SFE_LOGO_FLAME.1_INCH  [SFE_LOGO_FLAME_.1]  16.28,7.21 0 bottom
U$2  SFE_LOGO_FLAME.1_INCH  [SFE_LOGO_FLAME_.1]  26.95,7.21 0 bottom
U$3  [QWIIC_5MM]  10.27,8 0 top
U$4  [QWIIC_5MM]  20.94,8 0 top
U$5  SFE_LOGO_FLAME.1_INCH  [SFE_LOGO_FLAME_.1]  37.62,7.21 0 bottom
U$6  [QWIIC_5MM]  31.61,8 0 top
U$7  SFE_LOGO_FLAME.1_INCH  [SFE_LOGO_FLAME_.1]  48.29,7.21 0 bottom
U$8  [QWIIC_5MM]  42.28,8 0 top
U$9  SFE_LOGO_FLAME.1_INCH  [SFE_LOGO_FLAME_.1]  58.95,7.21 0 bottom
U$10  [QWIIC_5MM]  52.95,8 0 top
U$11  SFE_LOGO_FLAME.1_INCH  [SFE_LOGO_FLAME_.1]  69.62,7.21 0 bottom
U$12  [QWIIC_5MM]  63.61,8 0 top
U$13  SFE_LOGO_FLAME.1_INCH  [SFE_LOGO_FLAME_.1]  80.29,7.21 0 bottom
U$14  [QWIIC_5MM]  74.28,8 0 top
U$15  SFE_LOGO_FLAME.1_INCH  [SFE_LOGO_FLAME_.1]  90.96,7.21 0 bottom
U$16  [QWIIC_5MM]  84.95,8 0 top
U$17  SFE_LOGO_FLAME.1_INCH  [SFE_LOGO_FLAME_.1]  16.28,21.69 0 bottom
U$18  [QWIIC_5MM]  10.27,22.48 0 top
U$19  SFE_LOGO_FLAME.1_INCH  [SFE_LOGO_FLAME_.1]  26.95,21.69 0 bottom
U$20  [QWIIC_5MM]  20.94,22.48 0 top
U$21  SFE_LOGO_FLAME.1_INCH  [SFE_LOGO_FLAME_.1]  37.62,21.69 0 bottom
U$22  [QWIIC_5MM]  31.61,22.48 0 top
U$23  SFE_LOGO_FLAME.1_INCH  [SFE_LOGO_FLAME_.1]  48.29,21.69 0 bottom
U$24  [QWIIC_5MM]  42.28,22.48 0 top
U$25  SFE_LOGO_FLAME.1_INCH  [SFE_LOGO_FLAME_.1]  58.95,21.69 0 bottom
U$26  [QWIIC_5MM]  52.95,22.48 0 top
U$27  SFE_LOGO_FLAME.1_INCH  [SFE_LOGO_FLAME_.1]  69.62,21.69 0 bottom
U$28  [QWIIC_5MM]  63.61,22.48 0 top
U$29  SFE_LOGO_FLAME.1_INCH  [SFE_LOGO_FLAME_.1]  80.29,21.69 0 bottom
U$30  [QWIIC_5MM]  74.28,22.48 0 top
U$31  SFE_LOGO_FLAME.1_INCH  [SFE_LOGO_FLAME_.1]  90.96,21.69 0 bottom
U$32  [QWIIC_5MM]  84.95,22.48 0 top
U$33  SFE_LOGO_FLAME.1_INCH  [SFE_LOGO_FLAME_.1]  16.28,36.17 0 bottom
U$34  [QWIIC_5MM]  10.27,36.96 0 top
U$35  SFE_LOGO_FLAME.1_INCH  [SFE_LOGO_FLAME_.1]  26.95,36.17 0 bottom
U$36  [QWIIC_5MM]  20.94,36.96 0 top
U$37  SFE_LOGO_FLAME.1_INCH  [SFE_LOGO_FLAME_.1]  37.62,36.17 0 bottom
U$38  [QWIIC_5MM]  31.61,36.96 0 top
U$39  SFE_LOGO_FLAME.1_INCH  [SFE_LOGO_FLAME_.1]  48.29,36.17 0 bottom
U$40  [QWIIC_5MM]  42.28,36.96 0 top
U$41  SFE_LOGO_FLAME.1_INCH  [SFE_LOGO_FLAME_.1]  58.95,36.17 0 bottom
U$42  [QWIIC_5MM]  52.95,36.96 0 top
U$43  SFE_LOGO_FLAME.1_INCH  [SFE_LOGO_FLAME_.1]  69.62,36.17 0 bottom
U$44  [QWIIC_5MM]  63.61,36.96 0 top
U$45  SFE_LOGO_FLAME.1_INCH  [SFE_LOGO_FLAME_.1]  80.29,36.17 0 bottom
U$46  [QWIIC_5MM]  74.28,36.96 0 top
U$47  SFE_LOGO_FLAME.1_INCH  [SFE_LOGO_FLAME_.1]  90.96,36.17 0 bottom
U$48  [QWIIC_5MM]  84.95,36.96 0 top
U$49  SFE_LOGO_FLAME.1_INCH  [SFE_LOGO_FLAME_.1]  16.28,50.65 0 bottom
U$50  [QWIIC_5MM]  10.27,51.43 0 top
U$51  SFE_LOGO_FLAME.1_INCH  [SFE_LOGO_FLAME_.1]  26.95,50.65 0 bottom
U$52  [QWIIC_5MM]  20.94,51.43 0 top
U$53  SFE_LOGO_FLAME.1_INCH  [SFE_LOGO_FLAME_.1]  37.62,50.65 0 bottom
U$54  [QWIIC_5MM]  31.61,51.43 0 top
U$55  SFE_LOGO_FLAME.1_INCH  [SFE_LOGO_FLAME_.1]  48.29,50.65 0 bottom
U$56  [QWIIC_5MM]  42.28,51.43 0 top
U$57  SFE_LOGO_FLAME.1_INCH  [SFE_LOGO_FLAME_.1]  58.95,50.65 0 bottom
U$58  [QWIIC_5MM]  52.95,51.43 0 top
U$59  SFE_LOGO_FLAME.1_INCH  [SFE_LOGO_FLAME_.1]  69.62,50.65 0 bottom
U$60  [QWIIC_5MM]  63.61,51.43 0 top
U$61  SFE_LOGO_FLAME.1_INCH  [SFE_LOGO_FLAME_.1]  80.29,50.65 0 bottom
U$62  [QWIIC_5MM]  74.28,51.43 0 top
U$63  SFE_LOGO_FLAME.1_INCH  [SFE_LOGO_FLAME_.1]  90.96,50.65 0 bottom
U$64  [QWIIC_5MM]  84.95,51.43 0 top

## Library data of the parts
C1-C64 = SparkFun-Capacitors; PROD_ID: CAP-00868
E$1 E$2 FD1-FD128 LOGO1-LOGO32 U$1-U$64 = SparkFun-Aesthetics
E$3 = SparkFun-Retired
J1 J2 J4 J6 J8 J11 J13 J15 J17 J19 J21 J23 J25 J27 J29 J31 J33 J35 J37 J39 J41 J43 J45 J47 J49 J51 J53 J55 J57 J59 J61 J63 = SparkFun-Connectors; PROD_ID: CONN-13694
J3 J5 J7 J9 J10 J12 J14 J16 J18 J20 J22 J24 J26 J28 J30 J32 J34 J36 J38 J40 J42 J44 J46 J48 J50 J52 J54 J56 J58 J60 J62 J64 = Qwiic Pi SHIM
U1-U32 = SparkFun-IC-Power; PROD_ID: VREG-12457

## Nets
3.3V: C3.1 J1.2 U2.5
3.3V1: C4.1 J2.2 U1.5
3.3V2: C6.1 J4.2 U3.5
3.3V3: C8.1 J6.2 U4.5
3.3V4: C10.1 J8.2 U5.5
3.3V5: C12.1 J11.2 U6.5
3.3V6: C14.1 J13.2 U7.5
3.3V7: C16.1 J15.2 U8.5
3.3V8: C18.1 J17.2 U9.5
3.3V9: C20.1 J19.2 U10.5
3.3V10: C22.1 J21.2 U11.5
3.3V11: C24.1 J23.2 U12.5
3.3V12: C26.1 J25.2 U13.5
3.3V13: C28.1 J27.2 U14.5
3.3V14: C30.1 J29.2 U15.5
3.3V15: C32.1 J31.2 U16.5
3.3V16: C34.1 J33.2 U17.5
3.3V17: C36.1 J35.2 U18.5
3.3V18: C38.1 J37.2 U19.5
3.3V19: C40.1 J39.2 U20.5
3.3V20: C42.1 J41.2 U21.5
3.3V21: C44.1 J43.2 U22.5
3.3V22: C46.1 J45.2 U23.5
3.3V23: C48.1 J47.2 U24.5
3.3V24: C50.1 J49.2 U25.5
3.3V25: C52.1 J51.2 U26.5
3.3V26: C54.1 J53.2 U27.5
3.3V27: C56.1 J55.2 U28.5
3.3V28: C58.1 J57.2 U29.5
3.3V29: C60.1 J59.2 U30.5
3.3V30: C62.1 J61.2 U31.5
3.3V31: C64.1 J63.2 U32.5
5V: C1.1 J9.2 J9.4 U2.1 U2.3
5V1: C2.1 J3.2 J3.4 U1.1 U1.3
5V2: C5.1 J5.2 J5.4 U3.1 U3.3
5V3: C7.1 J7.2 J7.4 U4.1 U4.3
5V4: C9.1 J10.2 J10.4 U5.1 U5.3
5V5: C11.1 J12.2 J12.4 U6.1 U6.3
5V6: C13.1 J14.2 J14.4 U7.1 U7.3
5V7: C15.1 J16.2 J16.4 U8.1 U8.3
5V8: C17.1 J18.2 J18.4 U9.1 U9.3
5V9: C19.1 J20.2 J20.4 U10.1 U10.3
5V10: C21.1 J22.2 J22.4 U11.1 U11.3
5V11: C23.1 J24.2 J24.4 U12.1 U12.3
5V12: C25.1 J26.2 J26.4 U13.1 U13.3
5V13: C27.1 J28.2 J28.4 U14.1 U14.3
5V14: C29.1 J30.2 J30.4 U15.1 U15.3
5V15: C31.1 J32.2 J32.4 U16.1 U16.3
5V16: C33.1 J34.2 J34.4 U17.1 U17.3
5V17: C35.1 J36.2 J36.4 U18.1 U18.3
5V18: C37.1 J38.2 J38.4 U19.1 U19.3
5V19: C39.1 J40.2 J40.4 U20.1 U20.3
5V20: C41.1 J42.2 J42.4 U21.1 U21.3
5V21: C43.1 J44.2 J44.4 U22.1 U22.3
5V22: C45.1 J46.2 J46.4 U23.1 U23.3
5V23: C47.1 J48.2 J48.4 U24.1 U24.3
5V24: C49.1 J50.2 J50.4 U25.1 U25.3
5V25: C51.1 J52.2 J52.4 U26.1 U26.3
5V26: C53.1 J54.2 J54.4 U27.1 U27.3
5V27: C55.1 J56.2 J56.4 U28.1 U28.3
5V28: C57.1 J58.2 J58.4 U29.1 U29.3
5V29: C59.1 J60.2 J60.4 U30.1 U30.3
5V30: C61.1 J62.2 J62.4 U31.1 U31.3
5V31: C63.1 J64.2 J64.4 U32.1 U32.3
GND [vcc]: C1.2 C3.2 J1.1 J9.6 U2.2
GND1 [vcc]: C2.2 C4.2 J2.1 J3.6 U1.2
GND2 [vcc]: C5.2 C6.2 J4.1 J5.6 U3.2
GND3 [vcc]: C7.2 C8.2 J6.1 J7.6 U4.2
GND4 [vcc]: C9.2 C10.2 J8.1 J10.6 U5.2
GND5 [vcc]: C11.2 C12.2 J11.1 J12.6 U6.2
GND6 [vcc]: C13.2 C14.2 J13.1 J14.6 U7.2
GND7 [vcc]: C15.2 C16.2 J15.1 J16.6 U8.2
GND8 [vcc]: C17.2 C18.2 J17.1 J18.6 U9.2
GND9 [vcc]: C19.2 C20.2 J19.1 J20.6 U10.2
GND10 [vcc]: C21.2 C22.2 J21.1 J22.6 U11.2
GND11 [vcc]: C23.2 C24.2 J23.1 J24.6 U12.2
GND12 [vcc]: C25.2 C26.2 J25.1 J26.6 U13.2
GND13 [vcc]: C27.2 C28.2 J27.1 J28.6 U14.2
GND14 [vcc]: C29.2 C30.2 J29.1 J30.6 U15.2
GND15 [vcc]: C31.2 C32.2 J31.1 J32.6 U16.2
GND16 [vcc]: C33.2 C34.2 J33.1 J34.6 U17.2
GND17 [vcc]: C35.2 C36.2 J35.1 J36.6 U18.2
GND18 [vcc]: C37.2 C38.2 J37.1 J38.6 U19.2
GND19 [vcc]: C39.2 C40.2 J39.1 J40.6 U20.2
GND20 [vcc]: C41.2 C42.2 J41.1 J42.6 U21.2
GND21 [vcc]: C43.2 C44.2 J43.1 J44.6 U22.2
GND22 [vcc]: C45.2 C46.2 J45.1 J46.6 U23.2
GND23 [vcc]: C47.2 C48.2 J47.1 J48.6 U24.2
GND24 [vcc]: C49.2 C50.2 J49.1 J50.6 U25.2
GND25 [vcc]: C51.2 C52.2 J51.1 J52.6 U26.2
GND26 [vcc]: C53.2 C54.2 J53.1 J54.6 U27.2
GND27 [vcc]: C55.2 C56.2 J55.1 J56.6 U28.2
GND28 [vcc]: C57.2 C58.2 J57.1 J58.6 U29.2
GND29 [vcc]: C59.2 C60.2 J59.1 J60.6 U30.2
GND30 [vcc]: C61.2 C62.2 J61.1 J62.6 U31.2
GND31 [vcc]: C63.2 C64.2 J63.1 J64.6 U32.2
NC: J9.1
NC1: J3.1
NC2: J5.1
NC3: J7.1
NC4: J10.1
NC5: J12.1
NC6: J14.1
NC7: J16.1
NC8: J18.1
NC9: J20.1
NC10: J22.1
NC11: J24.1
NC12: J26.1
NC13: J28.1
NC14: J30.1
NC15: J32.1
NC16: J34.1
NC17: J36.1
NC18: J38.1
NC19: J40.1
NC20: J42.1
NC21: J44.1
NC22: J46.1
NC23: J48.1
NC24: J50.1
NC25: J52.1
NC26: J54.1
NC27: J56.1
NC28: J58.1
NC29: J60.1
NC30: J62.1
NC31: J64.1
SCL: J1.4 J9.5
SCL1: J2.4 J3.5
SCL2: J4.4 J5.5
SCL3: J6.4 J7.5
SCL4: J8.4 J10.5
SCL5: J11.4 J12.5
SCL6: J13.4 J14.5
SCL7: J15.4 J16.5
SCL8: J17.4 J18.5
SCL9: J19.4 J20.5
SCL10: J21.4 J22.5
SCL11: J23.4 J24.5
SCL12: J25.4 J26.5
SCL13: J27.4 J28.5
SCL14: J29.4 J30.5
SCL15: J31.4 J32.5
SCL16: J33.4 J34.5
SCL17: J35.4 J36.5
SCL18: J37.4 J38.5
SCL19: J39.4 J40.5
SCL20: J41.4 J42.5
SCL21: J43.4 J44.5
SCL22: J45.4 J46.5
SCL23: J47.4 J48.5
SCL24: J49.4 J50.5
SCL25: J51.4 J52.5
SCL26: J53.4 J54.5
SCL27: J55.4 J56.5
SCL28: J57.4 J58.5
SCL29: J59.4 J60.5
SCL30: J61.4 J62.5
SCL31: J63.4 J64.5
SDA: J1.3 J9.3
SDA1: J2.3 J3.3
SDA2: J4.3 J5.3
SDA3: J6.3 J7.3
SDA4: J8.3 J10.3
SDA5: J11.3 J12.3
SDA6: J13.3 J14.3
SDA7: J15.3 J16.3
SDA8: J17.3 J18.3
SDA9: J19.3 J20.3
SDA10: J21.3 J22.3
SDA11: J23.3 J24.3
SDA12: J25.3 J26.3
SDA13: J27.3 J28.3
SDA14: J29.3 J30.3
SDA15: J31.3 J32.3
SDA16: J33.3 J34.3
SDA17: J35.3 J36.3
SDA18: J37.3 J38.3
SDA19: J39.3 J40.3
SDA20: J41.3 J42.3
SDA21: J43.3 J44.3
SDA22: J45.3 J46.3
SDA23: J47.3 J48.3
SDA24: J49.3 J50.3
SDA25: J51.3 J52.3
SDA26: J53.3 J54.3
SDA27: J55.3 J56.3
SDA28: J57.3 J58.3
SDA29: J59.3 J60.3
SDA30: J61.3 J62.3
SDA31: J63.3 J64.3

## Tracks (layer width: path | path; a pad name or v marks a point on that pad's centre or on a via)
3.3V
  Top 0.254: J1.2 13.07,12.95 13.34,13.21 U2.5 13.88,14.66 C3.1
3.3V1
  Top 0.254: J2.2 23.74,12.95 24.01,13.21 U1.5 24.55,14.66 C4.1
3.3V2
  Top 0.254: J4.2 34.41,12.95 34.68,13.21 U3.5 35.22,14.66 C6.1
3.3V3
  Top 0.254: J6.2 45.08,12.95 45.34,13.21 U4.5 45.89,14.66 C8.1
3.3V4
  Top 0.254: J8.2 55.74,12.95 56.01,13.21 U5.5 56.56,14.66 C10.1
3.3V5
  Top 0.254: J11.2 66.41,12.95 66.68,13.21 U6.5 67.22,14.66 C12.1
3.3V6
  Top 0.254: J13.2 77.08,12.95 77.35,13.21 U7.5 77.89,14.66 C14.1
3.3V7
  Top 0.254: J15.2 87.75,12.95 88.02,13.21 U8.5 88.56,14.66 C16.1
3.3V8
  Top 0.254: J17.2 13.07,27.42 13.34,27.69 U9.5 13.88,29.14 C18.1
3.3V9
  Top 0.254: J19.2 23.74,27.42 24.01,27.69 U10.5 24.55,29.14 C20.1
3.3V10
  Top 0.254: J21.2 34.41,27.42 34.68,27.69 U11.5 35.22,29.14 C22.1
3.3V11
  Top 0.254: J23.2 45.08,27.42 45.34,27.69 U12.5 45.89,29.14 C24.1
3.3V12
  Top 0.254: J25.2 55.74,27.42 56.01,27.69 U13.5 56.56,29.14 C26.1
3.3V13
  Top 0.254: J27.2 66.41,27.42 66.68,27.69 U14.5 67.22,29.14 C28.1
3.3V14
  Top 0.254: J29.2 77.08,27.42 77.35,27.69 U15.5 77.89,29.14 C30.1
3.3V15
  Top 0.254: J31.2 87.75,27.42 88.02,27.69 U16.5 88.56,29.14 C32.1
3.3V16
  Top 0.254: J33.2 13.07,41.9 13.34,42.17 U17.5 13.88,43.61 C34.1
3.3V17
  Top 0.254: J35.2 23.74,41.9 24.01,42.17 U18.5 24.55,43.61 C36.1
3.3V18
  Top 0.254: J37.2 34.41,41.9 34.68,42.17 U19.5 35.22,43.61 C38.1
3.3V19
  Top 0.254: J39.2 45.08,41.9 45.34,42.17 U20.5 45.89,43.61 C40.1
3.3V20
  Top 0.254: J41.2 55.74,41.9 56.01,42.17 U21.5 56.56,43.61 C42.1
3.3V21
  Top 0.254: J43.2 66.41,41.9 66.68,42.17 U22.5 67.22,43.61 C44.1
3.3V22
  Top 0.254: J45.2 77.08,41.9 77.35,42.17 U23.5 77.89,43.61 C46.1
3.3V23
  Top 0.254: J47.2 87.75,41.9 88.02,42.17 U24.5 88.56,43.61 C48.1
3.3V24
  Top 0.254: J49.2 13.07,56.38 13.34,56.65 U25.5 13.88,58.09 C50.1
3.3V25
  Top 0.254: J51.2 23.74,56.38 24.01,56.65 U26.5 24.55,58.09 C52.1
3.3V26
  Top 0.254: J53.2 34.41,56.38 34.68,56.65 U27.5 35.22,58.09 C54.1
3.3V27
  Top 0.254: J55.2 45.08,56.38 45.34,56.65 U28.5 45.89,58.09 C56.1
3.3V28
  Top 0.254: J57.2 55.74,56.38 56.01,56.65 U29.5 56.56,58.09 C58.1
3.3V29
  Top 0.254: J59.2 66.41,56.38 66.68,56.65 U30.5 67.22,58.09 C60.1
3.3V30
  Top 0.254: J61.2 77.08,56.38 77.35,56.65 U31.5 77.89,58.09 C62.1
3.3V31
  Top 0.254: J63.2 87.75,56.38 88.02,56.65 U32.5 88.56,58.09 C64.1
5V  (via drill 0.38)
  Top 0.203: 9.41,19.38 9.41,16.13
  Top 0.254: U2.3 15.78,11.37 15.62,11.53 14.05,11.53 13.88,11.37 U2.1 13.88,9.55 C1.1 13.45,9.12 11.38,9.12 9.86,10.64 v9.86,15.47 | J9.4 9.41,19.38 | 9.41,16.13 9.86,15.68
  Bottom 0.203: J9.4 9.41,19.38 9.41,16.13
  Bottom 0.254: 9.41,16.13 9.86,15.68 v9.86,15.47
  pour Top: 11.61,20.07 7.24,20.07 7.24,18.69 11.61,18.69
  pour Bottom: 11.61,18.69 7.24,18.69 7.24,20.07 11.61,20.07
5V1  (via drill 0.38)
  Top 0.203: 20.08,19.38 20.08,16.13
  Top 0.254: U1.3 26.45,11.37 26.29,11.53 24.71,11.53 24.55,11.37 U1.1 24.55,9.55 C2.1 24.12,9.12 22.05,9.12 20.52,10.64 v20.52,15.47 | J3.4 20.08,19.38 | 20.08,16.13 20.52,15.68
  Bottom 0.203: J3.4 20.08,19.38 20.08,16.13
  Bottom 0.254: 20.08,16.13 20.52,15.68 v20.52,15.47
  pour Top: 22.28,20.07 17.91,20.07 17.91,18.69 22.28,18.69
  pour Bottom: 22.28,18.69 17.91,18.69 17.91,20.07 22.28,20.07
5V2  (via drill 0.38)
  Top 0.203: 30.75,19.38 30.75,16.13
  Top 0.254: U3.3 37.12,11.37 36.96,11.53 35.38,11.53 35.22,11.37 U3.1 35.22,9.55 C5.1 34.79,9.12 32.71,9.12 31.19,10.64 v31.19,15.47 | J5.4 30.75,19.38 | 30.75,16.13 31.19,15.68
  Bottom 0.203: J5.4 30.75,19.38 30.75,16.13
  Bottom 0.254: 30.75,16.13 31.19,15.68 v31.19,15.47
  pour Top: 32.94,20.07 28.57,20.07 28.57,18.69 32.94,18.69
  pour Bottom: 32.94,18.69 28.57,18.69 28.57,20.07 32.94,20.07
5V3  (via drill 0.38)
  Top 0.203: 41.41,19.38 41.41,16.13
  Top 0.254: U4.3 47.79,11.37 47.62,11.53 46.05,11.53 45.89,11.37 U4.1 45.89,9.55 C7.1 45.45,9.12 43.38,9.12 41.86,10.64 v41.86,15.47 | J7.4 41.41,19.38 | 41.41,16.13 41.86,15.68
  Bottom 0.203: J7.4 41.41,19.38 41.41,16.13
  Bottom 0.254: 41.41,16.13 41.86,15.68 v41.86,15.47
  pour Top: 43.61,20.07 39.24,20.07 39.24,18.69 43.61,18.69
  pour Bottom: 43.61,18.69 39.24,18.69 39.24,20.07 43.61,20.07
5V4  (via drill 0.38)
  Top 0.203: 52.08,19.38 52.08,16.13
  Top 0.254: U5.3 58.46,11.37 58.29,11.53 56.72,11.53 56.56,11.37 U5.1 56.56,9.55 C9.1 56.12,9.12 54.05,9.12 52.53,10.64 v52.53,15.47 | J10.4 52.08,19.38 | 52.08,16.13 52.53,15.68
  Bottom 0.203: J10.4 52.08,19.38 52.08,16.13
  Bottom 0.254: 52.08,16.13 52.53,15.68 v52.53,15.47
  pour Top: 54.28,20.07 49.91,20.07 49.91,18.69 54.28,18.69
  pour Bottom: 54.28,18.69 49.91,18.69 49.91,20.07 54.28,20.07
5V5  (via drill 0.38)
  Top 0.203: 62.75,19.38 62.75,16.13
  Top 0.254: U6.3 69.12,11.37 68.96,11.53 67.39,11.53 67.22,11.37 U6.1 67.22,9.55 C11.1 66.79,9.12 64.72,9.12 63.2,10.64 v63.2,15.47 | J12.4 62.75,19.38 | 62.75,16.13 63.2,15.68
  Bottom 0.203: J12.4 62.75,19.38 62.75,16.13
  Bottom 0.254: 62.75,16.13 63.2,15.68 v63.2,15.47
  pour Top: 64.95,20.07 60.58,20.07 60.58,18.69 64.95,18.69
  pour Bottom: 64.95,18.69 60.58,18.69 60.58,20.07 64.95,20.07
5V6  (via drill 0.38)
  Top 0.203: 73.42,19.38 73.42,16.13
  Top 0.254: U7.3 79.79,11.37 79.63,11.53 78.05,11.53 77.89,11.37 U7.1 77.89,9.55 C13.1 77.46,9.12 75.39,9.12 73.86,10.64 v73.86,15.47 | J14.4 73.42,19.38 | 73.42,16.13 73.86,15.68
  Bottom 0.203: J14.4 73.42,19.38 73.42,16.13
  Bottom 0.254: 73.42,16.13 73.86,15.68 v73.86,15.47
  pour Top: 75.62,20.07 71.25,20.07 71.25,18.69 75.62,18.69
  pour Bottom: 75.62,18.69 71.25,18.69 71.25,20.07 75.62,20.07
5V7  (via drill 0.38)
  Top 0.203: 84.09,19.38 84.09,16.13
  Top 0.254: U8.3 90.46,11.37 90.3,11.53 88.72,11.53 88.56,11.37 U8.1 88.56,9.55 C15.1 88.13,9.12 86.06,9.12 84.53,10.64 v84.53,15.47 | J16.4 84.09,19.38 | 84.09,16.13 84.53,15.68
  Bottom 0.203: J16.4 84.09,19.38 84.09,16.13
  Bottom 0.254: 84.09,16.13 84.53,15.68 v84.53,15.47
  pour Top: 86.28,20.07 81.92,20.07 81.92,18.69 86.28,18.69
  pour Bottom: 86.28,18.69 81.92,18.69 81.92,20.07 86.28,20.07
5V8  (via drill 0.38)
  Top 0.203: 9.41,33.86 9.41,30.61
  Top 0.254: U9.3 15.78,25.85 15.62,26.01 14.05,26.01 13.88,25.85 U9.1 13.88,24.03 C17.1 13.45,23.6 11.38,23.6 9.86,25.12 v9.86,29.95 | J18.4 9.41,33.86 | 9.41,30.61 9.86,30.16
  Bottom 0.203: J18.4 9.41,33.86 9.41,30.61
  Bottom 0.254: 9.41,30.61 9.86,30.16 v9.86,29.95
  pour Top: 11.61,34.54 7.24,34.54 7.24,33.17 11.61,33.17
  pour Bottom: 11.61,33.17 7.24,33.17 7.24,34.54 11.61,34.54
5V9  (via drill 0.38)
  Top 0.203: 20.08,33.86 20.08,30.61
  Top 0.254: U10.3 26.45,25.85 26.29,26.01 24.71,26.01 24.55,25.85 U10.1 24.55,24.03 C19.1 24.12,23.6 22.05,23.6 20.52,25.12 v20.52,29.95 | J20.4 20.08,33.86 | 20.08,30.61 20.52,30.16
  Bottom 0.203: J20.4 20.08,33.86 20.08,30.61
  Bottom 0.254: 20.08,30.61 20.52,30.16 v20.52,29.95
  pour Top: 22.28,34.54 17.91,34.54 17.91,33.17 22.28,33.17
  pour Bottom: 22.28,33.17 17.91,33.17 17.91,34.54 22.28,34.54
5V10  (via drill 0.38)
  Top 0.203: 30.75,33.86 30.75,30.61
  Top 0.254: U11.3 37.12,25.85 36.96,26.01 35.38,26.01 35.22,25.85 U11.1 35.22,24.03 C21.1 34.79,23.6 32.71,23.6 31.19,25.12 v31.19,29.95 | J22.4 30.75,33.86 | 30.75,30.61 31.19,30.16
  Bottom 0.203: J22.4 30.75,33.86 30.75,30.61
  Bottom 0.254: 30.75,30.61 31.19,30.16 v31.19,29.95
  pour Top: 32.94,34.54 28.57,34.54 28.57,33.17 32.94,33.17
  pour Bottom: 32.94,33.17 28.57,33.17 28.57,34.54 32.94,34.54
5V11  (via drill 0.38)
  Top 0.203: 41.41,33.86 41.41,30.61
  Top 0.254: U12.3 47.79,25.85 47.62,26.01 46.05,26.01 45.89,25.85 U12.1 45.89,24.03 C23.1 45.45,23.6 43.38,23.6 41.86,25.12 v41.86,29.95 | J24.4 41.41,33.86 | 41.41,30.61 41.86,30.16
  Bottom 0.203: J24.4 41.41,33.86 41.41,30.61
  Bottom 0.254: 41.41,30.61 41.86,30.16 v41.86,29.95
  pour Top: 43.61,34.54 39.24,34.54 39.24,33.17 43.61,33.17
  pour Bottom: 43.61,33.17 39.24,33.17 39.24,34.54 43.61,34.54
5V12  (via drill 0.38)
  Top 0.203: 52.08,33.86 52.08,30.61
  Top 0.254: U13.3 58.46,25.85 58.29,26.01 56.72,26.01 56.56,25.85 U13.1 56.56,24.03 C25.1 56.12,23.6 54.05,23.6 52.53,25.12 v52.53,29.95 | J26.4 52.08,33.86 | 52.08,30.61 52.53,30.16
  Bottom 0.203: J26.4 52.08,33.86 52.08,30.61
  Bottom 0.254: 52.08,30.61 52.53,30.16 v52.53,29.95
  pour Top: 54.28,34.54 49.91,34.54 49.91,33.17 54.28,33.17
  pour Bottom: 54.28,33.17 49.91,33.17 49.91,34.54 54.28,34.54
5V13  (via drill 0.38)
  Top 0.203: 62.75,33.86 62.75,30.61
  Top 0.254: U14.3 69.12,25.85 68.96,26.01 67.39,26.01 67.22,25.85 U14.1 67.22,24.03 C27.1 66.79,23.6 64.72,23.6 63.2,25.12 v63.2,29.95 | J28.4 62.75,33.86 | 62.75,30.61 63.2,30.16
  Bottom 0.203: J28.4 62.75,33.86 62.75,30.61
  Bottom 0.254: 62.75,30.61 63.2,30.16 v63.2,29.95
  pour Top: 64.95,34.54 60.58,34.54 60.58,33.17 64.95,33.17
  pour Bottom: 64.95,33.17 60.58,33.17 60.58,34.54 64.95,34.54
5V14  (via drill 0.38)
  Top 0.203: 73.42,33.86 73.42,30.61
  Top 0.254: U15.3 79.79,25.85 79.63,26.01 78.05,26.01 77.89,25.85 U15.1 77.89,24.03 C29.1 77.46,23.6 75.39,23.6 73.86,25.12 v73.86,29.95 | J30.4 73.42,33.86 | 73.42,30.61 73.86,30.16
  Bottom 0.203: J30.4 73.42,33.86 73.42,30.61
  Bottom 0.254: 73.42,30.61 73.86,30.16 v73.86,29.95
  pour Top: 75.62,34.54 71.25,34.54 71.25,33.17 75.62,33.17
  pour Bottom: 75.62,33.17 71.25,33.17 71.25,34.54 75.62,34.54
5V15  (via drill 0.38)
  Top 0.203: 84.09,33.86 84.09,30.61
  Top 0.254: U16.3 90.46,25.85 90.3,26.01 88.72,26.01 88.56,25.85 U16.1 88.56,24.03 C31.1 88.13,23.6 86.06,23.6 84.53,25.12 v84.53,29.95 | J32.4 84.09,33.86 | 84.09,30.61 84.53,30.16
  Bottom 0.203: J32.4 84.09,33.86 84.09,30.61
  Bottom 0.254: 84.09,30.61 84.53,30.16 v84.53,29.95
  pour Top: 86.28,34.54 81.92,34.54 81.92,33.17 86.28,33.17
  pour Bottom: 86.28,33.17 81.92,33.17 81.92,34.54 86.28,34.54
5V16  (via drill 0.38)
  Top 0.203: 9.41,48.34 9.41,45.08
  Top 0.254: U17.3 15.78,40.32 15.62,40.49 14.05,40.49 13.88,40.32 U17.1 13.88,38.51 C33.1 13.45,38.07 11.38,38.07 9.86,39.6 v9.86,44.42 | J34.4 9.41,48.34 | 9.41,45.08 9.86,44.64
  Bottom 0.203: J34.4 9.41,48.34 9.41,45.08
  Bottom 0.254: 9.41,45.08 9.86,44.64 v9.86,44.42
  pour Top: 11.61,49.02 7.24,49.02 7.24,47.65 11.61,47.65
  pour Bottom: 11.61,47.65 7.24,47.65 7.24,49.02 11.61,49.02
5V17  (via drill 0.38)
  Top 0.203: 20.08,48.34 20.08,45.08
  Top 0.254: U18.3 26.45,40.32 26.29,40.49 24.71,40.49 24.55,40.32 U18.1 24.55,38.51 C35.1 24.12,38.07 22.05,38.07 20.52,39.6 v20.52,44.42 | J36.4 20.08,48.34 | 20.08,45.08 20.52,44.64
  Bottom 0.203: J36.4 20.08,48.34 20.08,45.08
  Bottom 0.254: 20.08,45.08 20.52,44.64 v20.52,44.42
  pour Top: 22.28,49.02 17.91,49.02 17.91,47.65 22.28,47.65
  pour Bottom: 22.28,47.65 17.91,47.65 17.91,49.02 22.28,49.02
5V18  (via drill 0.38)
  Top 0.203: 30.75,48.34 30.75,45.08
  Top 0.254: U19.3 37.12,40.32 36.96,40.49 35.38,40.49 35.22,40.32 U19.1 35.22,38.51 C37.1 34.79,38.07 32.71,38.07 31.19,39.6 v31.19,44.42 | J38.4 30.75,48.34 | 30.75,45.08 31.19,44.64
  Bottom 0.203: J38.4 30.75,48.34 30.75,45.08
  Bottom 0.254: 30.75,45.08 31.19,44.64 v31.19,44.42
  pour Top: 32.94,49.02 28.57,49.02 28.57,47.65 32.94,47.65
  pour Bottom: 32.94,47.65 28.57,47.65 28.57,49.02 32.94,49.02
5V19  (via drill 0.38)
  Top 0.203: 41.41,48.34 41.41,45.08
  Top 0.254: U20.3 47.79,40.32 47.62,40.49 46.05,40.49 45.89,40.32 U20.1 45.89,38.51 C39.1 45.45,38.07 43.38,38.07 41.86,39.6 v41.86,44.42 | J40.4 41.41,48.34 | 41.41,45.08 41.86,44.64
  Bottom 0.203: J40.4 41.41,48.34 41.41,45.08
  Bottom 0.254: 41.41,45.08 41.86,44.64 v41.86,44.42
  pour Top: 43.61,49.02 39.24,49.02 39.24,47.65 43.61,47.65
  pour Bottom: 43.61,47.65 39.24,47.65 39.24,49.02 43.61,49.02
5V20  (via drill 0.38)
  Top 0.203: 52.08,48.34 52.08,45.08
  Top 0.254: U21.3 58.46,40.32 58.29,40.49 56.72,40.49 56.56,40.32 U21.1 56.56,38.51 C41.1 56.12,38.07 54.05,38.07 52.53,39.6 v52.53,44.42 | J42.4 52.08,48.34 | 52.08,45.08 52.53,44.64
  Bottom 0.203: J42.4 52.08,48.34 52.08,45.08
  Bottom 0.254: 52.08,45.08 52.53,44.64 v52.53,44.42
  pour Top: 54.28,49.02 49.91,49.02 49.91,47.65 54.28,47.65
  pour Bottom: 54.28,47.65 49.91,47.65 49.91,49.02 54.28,49.02
5V21  (via drill 0.38)
  Top 0.203: 62.75,48.34 62.75,45.08
  Top 0.254: U22.3 69.12,40.32 68.96,40.49 67.39,40.49 67.22,40.32 U22.1 67.22,38.51 C43.1 66.79,38.07 64.72,38.07 63.2,39.6 v63.2,44.42 | J44.4 62.75,48.34 | 62.75,45.08 63.2,44.64
  Bottom 0.203: J44.4 62.75,48.34 62.75,45.08
  Bottom 0.254: 62.75,45.08 63.2,44.64 v63.2,44.42
  pour Top: 64.95,49.02 60.58,49.02 60.58,47.65 64.95,47.65
  pour Bottom: 64.95,47.65 60.58,47.65 60.58,49.02 64.95,49.02
5V22  (via drill 0.38)
  Top 0.203: 73.42,48.34 73.42,45.08
  Top 0.254: U23.3 79.79,40.32 79.63,40.49 78.05,40.49 77.89,40.32 U23.1 77.89,38.51 C45.1 77.46,38.07 75.39,38.07 73.86,39.6 v73.86,44.42 | J46.4 73.42,48.34 | 73.42,45.08 73.86,44.64
  Bottom 0.203: J46.4 73.42,48.34 73.42,45.08
  Bottom 0.254: 73.42,45.08 73.86,44.64 v73.86,44.42
  pour Top: 75.62,49.02 71.25,49.02 71.25,47.65 75.62,47.65
  pour Bottom: 75.62,47.65 71.25,47.65 71.25,49.02 75.62,49.02
5V23  (via drill 0.38)
  Top 0.203: 84.09,48.34 84.09,45.08
  Top 0.254: U24.3 90.46,40.32 90.3,40.49 88.72,40.49 88.56,40.32 U24.1 88.56,38.51 C47.1 88.13,38.07 86.06,38.07 84.53,39.6 v84.53,44.42 | J48.4 84.09,48.34 | 84.09,45.08 84.53,44.64
  Bottom 0.203: J48.4 84.09,48.34 84.09,45.08
  Bottom 0.254: 84.09,45.08 84.53,44.64 v84.53,44.42
  pour Top: 86.28,49.02 81.92,49.02 81.92,47.65 86.28,47.65
  pour Bottom: 86.28,47.65 81.92,47.65 81.92,49.02 86.28,49.02
5V24  (via drill 0.38)
  Top 0.203: 9.41,62.81 9.41,59.56
  Top 0.254: U25.3 15.78,54.8 15.62,54.97 14.05,54.97 13.88,54.8 U25.1 13.88,52.99 C49.1 13.45,52.55 11.38,52.55 9.86,54.08 v9.86,58.9 | J50.4 9.41,62.81 | 9.41,59.56 9.86,59.12
  Bottom 0.203: J50.4 9.41,62.81 9.41,59.56
  Bottom 0.254: 9.41,59.56 9.86,59.12 v9.86,58.9
  pour Top: 11.61,63.5 7.24,63.5 7.24,62.13 11.61,62.13
  pour Bottom: 11.61,62.13 7.24,62.13 7.24,63.5 11.61,63.5
5V25  (via drill 0.38)
  Top 0.203: 20.08,62.81 20.08,59.56
  Top 0.254: U26.3 26.45,54.8 26.29,54.97 24.71,54.97 24.55,54.8 U26.1 24.55,52.99 C51.1 24.12,52.55 22.05,52.55 20.52,54.08 v20.52,58.9 | J52.4 20.08,62.81 | 20.08,59.56 20.52,59.12
  Bottom 0.203: J52.4 20.08,62.81 20.08,59.56
  Bottom 0.254: 20.08,59.56 20.52,59.12 v20.52,58.9
  pour Top: 22.28,63.5 17.91,63.5 17.91,62.13 22.28,62.13
  pour Bottom: 22.28,62.13 17.91,62.13 17.91,63.5 22.28,63.5
5V26  (via drill 0.38)
  Top 0.203: 30.75,62.81 30.75,59.56
  Top 0.254: U27.3 37.12,54.8 36.96,54.97 35.38,54.97 35.22,54.8 U27.1 35.22,52.99 C53.1 34.79,52.55 32.71,52.55 31.19,54.08 v31.19,58.9 | J54.4 30.75,62.81 | 30.75,59.56 31.19,59.12
  Bottom 0.203: J54.4 30.75,62.81 30.75,59.56
  Bottom 0.254: 30.75,59.56 31.19,59.12 v31.19,58.9
  pour Top: 32.94,63.5 28.57,63.5 28.57,62.13 32.94,62.13
  pour Bottom: 32.94,62.13 28.57,62.13 28.57,63.5 32.94,63.5
5V27  (via drill 0.38)
  Top 0.203: 41.41,62.81 41.41,59.56
  Top 0.254: U28.3 47.79,54.8 47.62,54.97 46.05,54.97 45.89,54.8 U28.1 45.89,52.99 C55.1 45.45,52.55 43.38,52.55 41.86,54.08 v41.86,58.9 | J56.4 41.41,62.81 | 41.41,59.56 41.86,59.12
  Bottom 0.203: J56.4 41.41,62.81 41.41,59.56
  Bottom 0.254: 41.41,59.56 41.86,59.12 v41.86,58.9
  pour Top: 43.61,63.5 39.24,63.5 39.24,62.13 43.61,62.13
  pour Bottom: 43.61,62.13 39.24,62.13 39.24,63.5 43.61,63.5
5V28  (via drill 0.38)
  Top 0.203: 52.08,62.81 52.08,59.56
  Top 0.254: U29.3 58.46,54.8 58.29,54.97 56.72,54.97 56.56,54.8 U29.1 56.56,52.99 C57.1 56.12,52.55 54.05,52.55 52.53,54.08 v52.53,58.9 | J58.4 52.08,62.81 | 52.08,59.56 52.53,59.12
  Bottom 0.203: J58.4 52.08,62.81 52.08,59.56
  Bottom 0.254: 52.08,59.56 52.53,59.12 v52.53,58.9
  pour Top: 54.28,63.5 49.91,63.5 49.91,62.13 54.28,62.13
  pour Bottom: 54.28,62.13 49.91,62.13 49.91,63.5 54.28,63.5
5V29  (via drill 0.38)
  Top 0.203: 62.75,62.81 62.75,59.56
  Top 0.254: U30.3 69.12,54.8 68.96,54.97 67.39,54.97 67.22,54.8 U30.1 67.22,52.99 C59.1 66.79,52.55 64.72,52.55 63.2,54.08 v63.2,58.9 | J60.4 62.75,62.81 | 62.75,59.56 63.2,59.12
  Bottom 0.203: J60.4 62.75,62.81 62.75,59.56
  Bottom 0.254: 62.75,59.56 63.2,59.12 v63.2,58.9
  pour Top: 64.95,63.5 60.58,63.5 60.58,62.13 64.95,62.13
  pour Bottom: 64.95,62.13 60.58,62.13 60.58,63.5 64.95,63.5
5V30  (via drill 0.38)
  Top 0.203: 73.42,62.81 73.42,59.56
  Top 0.254: U31.3 79.79,54.8 79.63,54.97 78.05,54.97 77.89,54.8 U31.1 77.89,52.99 C61.1 77.46,52.55 75.39,52.55 73.86,54.08 v73.86,58.9 | J62.4 73.42,62.81 | 73.42,59.56 73.86,59.12
  Bottom 0.203: J62.4 73.42,62.81 73.42,59.56
  Bottom 0.254: 73.42,59.56 73.86,59.12 v73.86,58.9
  pour Top: 75.62,63.5 71.25,63.5 71.25,62.13 75.62,62.13
  pour Bottom: 75.62,62.13 71.25,62.13 71.25,63.5 75.62,63.5
5V31  (via drill 0.38)
  Top 0.203: 84.09,62.81 84.09,59.56
  Top 0.254: U32.3 90.46,54.8 90.3,54.97 88.72,54.97 88.56,54.8 U32.1 88.56,52.99 C63.1 88.13,52.55 86.06,52.55 84.53,54.08 v84.53,58.9 | J64.4 84.09,62.81 | 84.09,59.56 84.53,59.12
  Bottom 0.203: J64.4 84.09,62.81 84.09,59.56
  Bottom 0.254: 84.09,59.56 84.53,59.12 v84.53,58.9
  pour Top: 86.28,63.5 81.92,63.5 81.92,62.13 86.28,62.13
  pour Bottom: 86.28,62.13 81.92,62.13 81.92,63.5 86.28,63.5
GND  (via drill 0.38)
  Top 0.203: 11.95,18.12 11.95,15.72
  Top 0.254: U2.2 14.83,9.54 C1.2 | J9.6 11.95,18.12
  Bottom 0.203: 11.95,18.12 11.95,15.72
  Bottom 0.254: J9.6 11.95,18.12
  other vias: 12.84,14.8 16.36,9.19 11.4,15.52
  pour Top: 6.86,6.86 6.86,15.75 17.02,15.75 17.02,6.86
  pour Bottom: 6.86,6.86 6.86,15.75 17.02,15.75 17.02,6.86
  pour Top: 12.34,18.67 14.12,18.67 14.12,20.09 12.34,20.09
  pour Bottom: 12.34,18.67 14.12,18.67 14.12,20.09 12.34,20.09
GND1  (via drill 0.38)
  Top 0.203: 22.62,18.12 22.62,15.72
  Top 0.254: U1.2 25.5,9.54 C2.2 | J3.6 22.62,18.12
  Bottom 0.203: 22.62,18.12 22.62,15.72
  Bottom 0.254: J3.6 22.62,18.12
  other vias: 23.51,14.8 27.03,9.19 22.07,15.52
  pour Top: 17.53,6.86 17.53,15.75 27.69,15.75 27.69,6.86
  pour Bottom: 17.53,6.86 17.53,15.75 27.69,15.75 27.69,6.86
  pour Top: 23.01,18.67 24.79,18.67 24.79,20.09 23.01,20.09
  pour Bottom: 23.01,18.67 24.79,18.67 24.79,20.09 23.01,20.09
GND2  (via drill 0.38)
  Top 0.203: 33.29,18.12 33.29,15.72
  Top 0.254: U3.2 36.17,9.54 C5.2 | J5.6 33.29,18.12
  Bottom 0.203: 33.29,18.12 33.29,15.72
  Bottom 0.254: J5.6 33.29,18.12
  other vias: 34.18,14.8 37.69,9.19 32.74,15.52
  pour Top: 28.19,6.86 28.19,15.75 38.35,15.75 38.35,6.86
  pour Bottom: 28.19,6.86 28.19,15.75 38.35,15.75 38.35,6.86
  pour Top: 33.68,18.67 35.46,18.67 35.46,20.09 33.68,20.09
  pour Bottom: 33.68,18.67 35.46,18.67 35.46,20.09 33.68,20.09
GND3  (via drill 0.38)
  Top 0.203: 43.95,18.12 43.95,15.72
  Top 0.254: U4.2 46.84,9.54 C7.2 | J7.6 43.95,18.12
  Bottom 0.203: 43.95,18.12 43.95,15.72
  Bottom 0.254: J7.6 43.95,18.12
  other vias: 44.84,14.8 48.36,9.19 43.41,15.52
  pour Top: 38.86,6.86 38.86,15.75 49.02,15.75 49.02,6.86
  pour Bottom: 38.86,6.86 38.86,15.75 49.02,15.75 49.02,6.86
  pour Top: 44.35,18.67 46.13,18.67 46.13,20.09 44.35,20.09
  pour Bottom: 44.35,18.67 46.13,18.67 46.13,20.09 44.35,20.09
GND4  (via drill 0.38)
  Top 0.203: 54.62,18.12 54.62,15.72
  Top 0.254: U5.2 57.51,9.54 C9.2 | J10.6 54.62,18.12
  Bottom 0.203: 54.62,18.12 54.62,15.72
  Bottom 0.254: J10.6 54.62,18.12
  other vias: 55.51,14.8 59.03,9.19 54.08,15.52
  pour Top: 49.53,6.86 49.53,15.75 59.69,15.75 59.69,6.86
  pour Bottom: 49.53,6.86 49.53,15.75 59.69,15.75 59.69,6.86
  pour Top: 55.02,18.67 56.79,18.67 56.79,20.09 55.02,20.09
  pour Bottom: 55.02,18.67 56.79,18.67 56.79,20.09 55.02,20.09
GND5  (via drill 0.38)
  Top 0.203: 65.29,18.12 65.29,15.72
  Top 0.254: U6.2 68.17,9.54 C11.2 | J12.6 65.29,18.12
  Bottom 0.203: 65.29,18.12 65.29,15.72
  Bottom 0.254: J12.6 65.29,18.12
  other vias: 66.18,14.8 69.7,9.19 64.74,15.52
  pour Top: 60.2,6.86 60.2,15.75 70.36,15.75 70.36,6.86
  pour Bottom: 60.2,6.86 60.2,15.75 70.36,15.75 70.36,6.86
  pour Top: 65.68,18.67 67.46,18.67 67.46,20.09 65.68,20.09
  pour Bottom: 65.68,18.67 67.46,18.67 67.46,20.09 65.68,20.09
GND6  (via drill 0.38)
  Top 0.203: 75.96,18.12 75.96,15.72
  Top 0.254: U7.2 78.84,9.54 C13.2 | J14.6 75.96,18.12
  Bottom 0.203: 75.96,18.12 75.96,15.72
  Bottom 0.254: J14.6 75.96,18.12
  other vias: 76.85,14.8 80.37,9.19 75.41,15.52
  pour Top: 70.87,6.86 70.87,15.75 81.03,15.75 81.03,6.86
  pour Bottom: 70.87,6.86 70.87,15.75 81.03,15.75 81.03,6.86
  pour Top: 76.35,18.67 78.13,18.67 78.13,20.09 76.35,20.09
  pour Bottom: 76.35,18.67 78.13,18.67 78.13,20.09 76.35,20.09
GND7  (via drill 0.38)
  Top 0.203: 86.63,18.12 86.63,15.72
  Top 0.254: U8.2 89.51,9.54 C15.2 | J16.6 86.63,18.12
  Bottom 0.203: 86.63,18.12 86.63,15.72
  Bottom 0.254: J16.6 86.63,18.12
  other vias: 87.52,14.8 91.03,9.19 86.08,15.52
  pour Top: 81.53,6.86 81.53,15.75 91.69,15.75 91.69,6.86
  pour Bottom: 81.53,6.86 81.53,15.75 91.69,15.75 91.69,6.86
  pour Top: 87.02,18.67 88.8,18.67 88.8,20.09 87.02,20.09
  pour Bottom: 87.02,18.67 88.8,18.67 88.8,20.09 87.02,20.09
GND8  (via drill 0.38)
  Top 0.203: 11.95,32.6 11.95,30.2
  Top 0.254: U9.2 14.83,24.02 C17.2 | J18.6 11.95,32.6
  Bottom 0.203: 11.95,32.6 11.95,30.2